# EAGLE board Display Board (EAGLE 8.2.2)
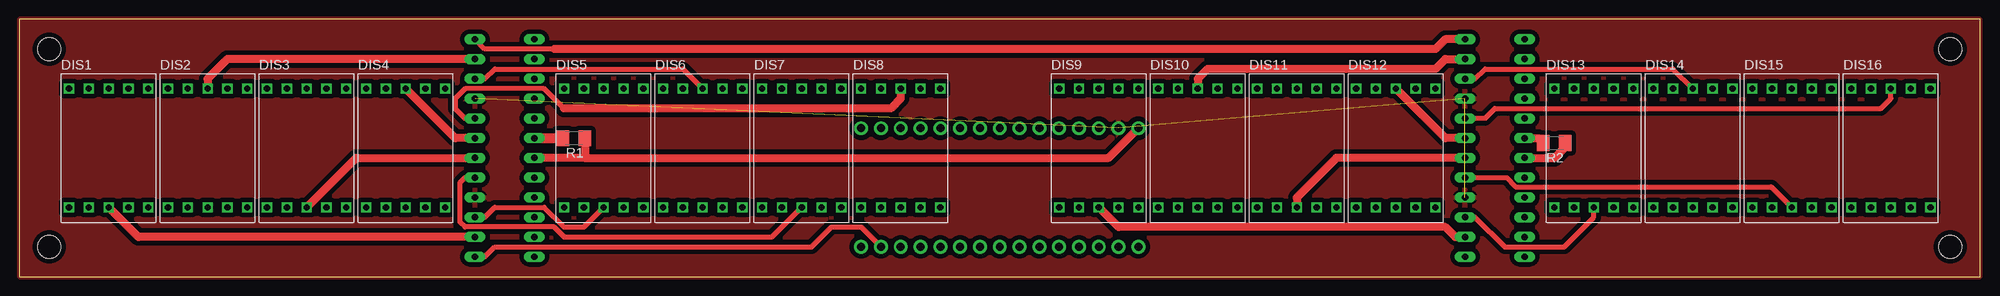
[diagram p0: board, top side]
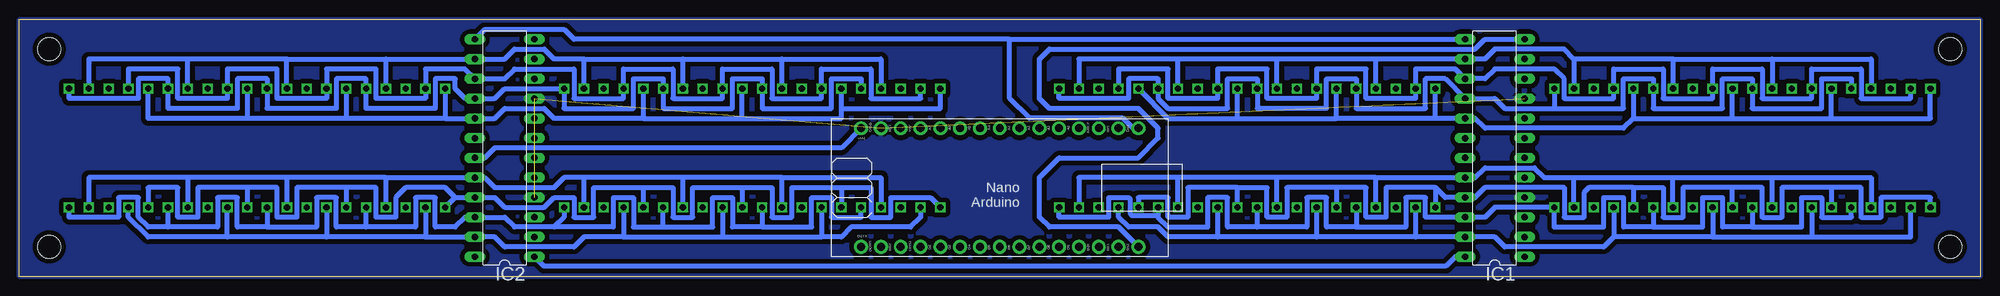
[diagram p1: board, bottom side, seen from below]

Size 251.46 x 33.02 mm. Coordinates in mm from the lower left corner, seen from the top.
Outline: 0,0 251.46,0 251.46,33.02 0,33.02 0,0
Copper layers (1*16): Top 0.035mm / dielectric 1.5mm / Bottom 0.035mm
Design rules "default *": minimum track width 10mil, minimum drill 24mil, track to track 8mil, track to pad 4mil, pad to pad 4mil, via to via 4mil, smd to smd 4mil, copper to edge 0mil, drill to drill 8mil, minimum pad ring 10mil, minimum via ring 8mil, stop-mask expansion 4mil, vias tented up to drill 0mil, thermal gap 10mil
Holes 3 mm at 247.65,29.21 247.65,3.81 3.81,29.21 3.81,3.81

## Footprints (pad centres in the part's own frame; a part is rotated, then mirrored left to right if it is on the bottom)
MAN6780 = drill 0.8 square: P$1 0,-15.24; P$2 2.54,-15.24; P$3 5.08,-15.24; P$4 7.62,-15.24; P$5 10.16,-15.24; P$6 10.16,0; P$7 7.62,0; P$8 5.08,0; P$9 2.54,0; P$10 0,0
DIL24-3 = drill 0.813 long: 1 -13.97,-3.81; 2 -11.43,-3.81; 3 -8.89,-3.81; 4 -6.35,-3.81; 5 -3.81,-3.81; 6 -1.27,-3.81; 7 1.27,-3.81; 8 3.81,-3.81; 9 6.35,-3.81; 10 8.89,-3.81; 11 11.43,-3.81; 12 13.97,-3.81; 13 13.97,3.81; 14 11.43,3.81; 15 8.89,3.81; 16 6.35,3.81; 17 3.81,3.81; 18 1.27,3.81; 19 -1.27,3.81; 20 -3.81,3.81; 21 -6.35,3.81; 22 -8.89,3.81; 23 -11.43,3.81; 24 -13.97,3.81
ARDUINO_NANO = drill 1.016 pad 1.778: 3V3 6.35,1.27; 5V 31.75,1.27; A0 11.43,1.27; A1 13.97,1.27; A2 16.51,1.27; A3 19.05,1.27; A4 21.59,1.27; A5 24.13,1.27; A6 26.67,1.27; A7 29.21,1.27; D2 29.21,16.51; D3 26.67,16.51; D4 24.13,16.51; D5 21.59,16.51; D6 19.05,16.51; D7 16.51,16.51; D8 13.97,16.51; D9 11.43,16.51; D10 8.89,16.51; D11 6.35,16.51; D12 3.81,16.51; D13 3.81,1.27; GND 31.75,16.51; GND. 36.83,1.27; REF 8.89,1.27; RST 34.29,16.51; RST. 34.29,1.27; RX1 36.83,16.51; TX1 39.37,16.51; VIN 39.37,1.27
M1206 = smd 1.6 x 2: 1 -1.4,0; 2 1.4,0

## Placement (x,y rotation side)
DIS1  MAN6780E  [MAN6780]  6.35,24.13 0 top
DIS2  MAN6780E  [MAN6780]  19.05,24.13 0 top
DIS3  MAN6780E  [MAN6780]  31.75,24.13 0 top
DIS4  MAN6780E  [MAN6780]  44.45,24.13 0 top
DIS5  MAN6780E  [MAN6780]  69.85,24.13 0 top
DIS6  MAN6780E  [MAN6780]  82.55,24.13 0 top
DIS7  MAN6780E  [MAN6780]  95.25,24.13 0 top
DIS8  MAN6780E  [MAN6780]  107.95,24.13 0 top
DIS9  MAN6780E  [MAN6780]  133.35,24.13 0 top
DIS10  MAN6780E  [MAN6780]  146.05,24.13 0 top
DIS11  MAN6780E  [MAN6780]  158.75,24.13 0 top
DIS12  MAN6780E  [MAN6780]  171.45,24.13 0 top
DIS13  MAN6780E  [MAN6780]  196.85,24.13 0 top
DIS14  MAN6780E  [MAN6780]  209.55,24.13 0 top
DIS15  MAN6780E  [MAN6780]  222.25,24.13 0 top
DIS16  MAN6780E  [MAN6780]  234.95,24.13 0 top
IC1  MAX7219CNG  [DIL24-3]  62.23,16.51 90 bottom
IC2  MAX7219CNG  [DIL24-3]  189.23,16.51 90 bottom
PCB1  ARDUINO_NANO  [ARDUINO_NANO]  104.14,20.32 180 bottom
R1  200R  [M1206]  71.12,17.78 180 top
R2  200R  [M1206]  196.85,17.14 180 top

## Library data of the parts
DIS1-DIS16 = 7segment
IC1 IC2 = maxim; MF: MAXIM; MPN: MAX7219CNG; OC_FARNELL: 1523914; OC_NEWARK: 34C4018
PCB1 = E14_Arduino_revC
R1 R2 = resistor

## Nets
GND: IC1.4 IC1.9 IC2.4 IC2.9 PCB1.GND.
N$1: DIS1.P$7 DIS2.P$7 DIS3.P$7 DIS4.P$7 DIS5.P$7 DIS6.P$7 DIS7.P$7 DIS8.P$7 IC1.14
N$2: DIS1.P$6 DIS2.P$6 DIS3.P$6 DIS4.P$6 DIS5.P$6 DIS6.P$6 DIS7.P$6 DIS8.P$6 IC1.16
N$3: DIS1.P$4 DIS2.P$4 DIS3.P$4 DIS4.P$4 DIS5.P$4 DIS6.P$4 DIS7.P$4 DIS8.P$4 IC1.20
N$4: DIS1.P$2 DIS2.P$2 DIS3.P$2 DIS4.P$2 DIS5.P$2 DIS6.P$2 DIS7.P$2 DIS8.P$2 IC1.23
N$5: DIS1.P$1 DIS2.P$1 DIS3.P$1 DIS4.P$1 DIS5.P$1 DIS6.P$1 DIS7.P$1 DIS8.P$1 IC1.21
N$6: DIS1.P$9 DIS2.P$9 DIS3.P$9 DIS4.P$9 DIS5.P$9 DIS6.P$9 DIS7.P$9 DIS8.P$9 IC1.15
N$7: DIS1.P$10 DIS2.P$10 DIS3.P$10 DIS4.P$10 DIS5.P$10 DIS6.P$10 DIS7.P$10 DIS8.P$10 IC1.17
N$8: DIS1.P$5 DIS2.P$5 DIS3.P$5 DIS4.P$5 DIS5.P$5 DIS6.P$5 DIS7.P$5 DIS8.P$5 IC1.22
N$9: DIS1.P$3 DIS1.P$8 IC1.2
N$10: DIS2.P$3 DIS2.P$8 IC1.11
N$11: DIS3.P$3 DIS3.P$8 IC1.6
N$12: DIS4.P$3 DIS4.P$8 IC1.7
N$13: DIS5.P$3 DIS5.P$8 IC1.3
N$14: DIS6.P$3 DIS6.P$8 IC1.10
N$15: DIS9.P$7 DIS10.P$7 DIS11.P$7 DIS12.P$7 DIS13.P$7 DIS14.P$7 DIS15.P$7 DIS16.P$7 IC2.14
N$16: DIS8.P$3 DIS8.P$8 IC1.8
N$17: DIS9.P$6 DIS10.P$6 DIS11.P$6 DIS12.P$6 DIS13.P$6 DIS14.P$6 DIS15.P$6 DIS16.P$6 IC2.16
N$18: DIS7.P$3 DIS7.P$8 IC1.5
N$19: DIS9.P$4 DIS10.P$4 DIS11.P$4 DIS12.P$4 DIS13.P$4 DIS14.P$4 DIS15.P$4 DIS16.P$4 IC2.20
N$20: DIS9.P$2 DIS10.P$2 DIS11.P$2 DIS12.P$2 DIS13.P$2 DIS14.P$2 DIS15.P$2 DIS16.P$2 IC2.23
N$21: DIS9.P$1 DIS10.P$1 DIS11.P$1 DIS12.P$1 DIS13.P$1 DIS14.P$1 DIS15.P$1 DIS16.P$1 IC2.21
N$22: DIS9.P$9 DIS10.P$9 DIS11.P$9 DIS12.P$9 DIS13.P$9 DIS14.P$9 DIS15.P$9 DIS16.P$9 IC2.15
N$23: IC1.18 R1.2
N$24: DIS9.P$10 DIS10.P$10 DIS11.P$10 DIS12.P$10 DIS13.P$10 DIS14.P$10 DIS15.P$10 DIS16.P$10 IC2.17
N$25: DIS9.P$5 DIS10.P$5 DIS11.P$5 DIS12.P$5 DIS13.P$5 DIS14.P$5 DIS15.P$5 DIS16.P$5 IC2.22
N$26: DIS9.P$3 DIS9.P$8 IC2.2
N$27: DIS10.P$3 DIS10.P$8 IC2.11
N$28: DIS11.P$3 DIS11.P$8 IC2.6
N$29: DIS12.P$3 DIS12.P$8 IC2.7
N$30: DIS13.P$3 DIS13.P$8 IC2.3
N$31: DIS14.P$3 DIS14.P$8 IC2.10
N$32: DIS16.P$3 DIS16.P$8 IC2.8
N$33: DIS15.P$3 DIS15.P$8 IC2.5
N$34: IC2.18 R2.2
N$35: IC1.24 IC2.1
N$36: IC1.13 IC2.13 PCB1.D13
N$37: IC1.12 IC2.12 PCB1.D12
N$38: IC1.1 PCB1.D11
VCC: IC1.19 IC2.19 PCB1.VIN R1.1 R2.1

## Tracks (layer width: path | path; a pad name or v marks a point on that pad's centre or on a via)
GND  (3 unrouted)
  pour Top (isolate 0.61): 0,33.02 0,0 251.46,0 251.46,33.02
  pour Bottom (isolate 0.61): 0,33.02 0,0 251.46,0 251.46,33.02
N$1
  Bottom 0.61: 77.47,27.94 90.17,27.94 | 90.17,27.94 102.87,27.94 | 102.87,27.94 115.57,27.94 DIS8.P$7 | DIS7.P$7 102.87,27.94 | DIS5.P$7 77.47,27.94 | DIS6.P$7 90.17,27.94 | 39.37,27.94 52.07,27.94 | 39.37,27.94 26.67,27.94 | 26.67,27.94 13.97,27.94 DIS1.P$7 | 26.67,27.94 DIS2.P$7 | 39.37,27.94 DIS3.P$7 | 52.07,27.94 DIS4.P$7 | 77.47,27.94 IC1.14 63.5,27.94 62.23,29.21 53.34,29.21 52.07,27.94
N$2
  Bottom 0.61: DIS8.P$6 118.11,22.86 109.22,22.86 109.22,25.4 105.41,25.4 DIS7.P$6 105.41,22.86 104.14,21.59 96.52,21.59 96.52,25.4 92.71,25.4 DIS6.P$6 92.71,21.59 83.82,21.59 83.82,25.4 80.01,25.4 DIS5.P$6 80.01,21.59 71.12,21.59 71.12,25.4 68.58,25.4 IC1.16 62.23,22.86 60.96,21.59 54.61,21.59 | DIS4.P$6 54.61,21.59 | 54.61,21.59 45.72,21.59 45.72,25.4 41.91,25.4 DIS3.P$6 41.91,21.59 33.02,21.59 33.02,25.4 29.21,25.4 DIS2.P$6 29.21,21.59 20.32,21.59 20.32,25.4 16.51,25.4 DIS1.P$6
N$3
  Bottom 0.61: 90.17,12.7 102.87,12.7 | 77.47,12.7 90.17,12.7 | 102.87,12.7 115.57,12.7 DIS8.P$4 | DIS7.P$4 102.87,12.7 | DIS6.P$4 90.17,12.7 | DIS5.P$4 77.47,12.7 | 39.37,12.7 26.67,12.7 | 52.07,12.7 39.37,12.7 | 26.67,12.7 13.97,12.7 DIS1.P$4 | DIS2.P$4 26.67,12.7 | DIS3.P$4 39.37,12.7 | DIS4.P$4 52.07,12.7 | 77.47,12.7 IC1.20 64.77,12.7 63.5,13.97 57.15,13.97 55.88,12.7 52.07,12.7
N$4
  Bottom 0.61: DIS1.P$2 8.89,5.08 21.59,5.08 | 34.29,5.08 21.59,5.08 | 34.29,5.08 46.99,5.08 | 72.39,5.08 85.09,5.08 | 85.09,5.08 97.79,5.08 | DIS5.P$2 72.39,5.08 | DIS6.P$2 85.09,5.08 | DIS7.P$2 97.79,5.08 | DIS2.P$2 21.59,5.08 | DIS3.P$2 34.29,5.08 | DIS4.P$2 46.99,5.08 | 72.39,5.08 IC1.23 62.23,5.08 60.96,3.81 48.26,3.81 46.99,5.08 | 97.79,5.08 104.14,5.08 105.41,6.35 109.22,6.35 110.49,7.62 DIS8.P$2
N$5
  Bottom 0.61: 69.85,9.53 DIS5.P$1 69.85,11.43 | 69.85,11.43 76.2,11.43 76.2,7.62 78.74,7.62 78.74,11.43 82.55,11.43 | 82.55,11.43 DIS6.P$1 | 82.55,11.43 88.9,11.43 88.9,7.62 91.44,7.62 91.44,11.43 95.25,11.43 | 95.25,11.43 101.6,11.43 101.6,7.62 104.14,7.62 104.14,10.16 107.95,10.16 DIS8.P$1 | DIS7.P$1 95.25,11.43 | 44.45,11.43 50.16,11.43 50.8,10.79 50.8,7.62 53.34,7.62 53.34,11.43 63.5,11.43 64.77,10.16 IC1.21 68.58,10.16 69.85,11.43 | 44.45,11.43 DIS4.P$1 | 19.05,11.43 25.4,11.43 25.4,7.62 27.94,7.62 27.94,11.43 31.75,11.43 | 19.05,11.43 DIS2.P$1 | 31.75,11.43 38.1,11.43 38.1,7.62 40.64,7.62 40.64,11.43 44.45,11.43 | DIS3.P$1 31.75,11.43 | 19.05,11.43 15.24,11.43 15.24,7.62 12.7,7.62 12.7,10.16 6.35,10.16 DIS1.P$1
N$6
  Bottom 0.61: DIS8.P$9 110.49,26.67 104.14,26.67 104.14,22.86 97.79,22.86 DIS7.P$9 97.79,26.67 91.44,26.67 91.44,22.86 85.09,22.86 DIS6.P$9 85.09,26.67 78.74,26.67 78.74,22.86 72.39,22.86 DIS5.P$9 72.39,26.67 67.31,26.67 IC1.15 63.5,25.4 62.23,26.67 54.61,26.67 53.34,25.4 53.34,22.86 46.99,22.86 DIS4.P$9 46.99,26.67 40.64,26.67 40.64,22.86 34.29,22.86 DIS3.P$9 34.29,26.67 27.94,26.67 27.94,22.86 21.59,22.86 DIS2.P$9 21.59,26.67 15.24,26.67 15.24,22.86 8.89,22.86 DIS1.P$9
N$7
  Bottom 0.61: 69.85,20.32 82.55,20.32 | 95.25,20.32 82.55,20.32 | 95.25,20.32 DIS7.P$10 | 82.55,20.32 DIS6.P$10 | 69.85,20.32 DIS5.P$10 | DIS4.P$10 44.45,20.32 | 44.45,20.32 31.75,20.32 | 31.75,20.32 DIS3.P$10 | 31.75,20.32 19.05,20.32 | 19.05,20.32 DIS2.P$10 | 19.05,20.32 6.35,20.32 DIS1.P$10 | 69.85,20.32 IC1.17 64.77,20.32 63.5,19.05 45.72,19.05 44.45,20.32 | DIS8.P$10 104.14,20.32 95.25,20.32
N$8
  Bottom 0.61: 80.01,6.35 73.66,6.35 73.66,10.16 71.12,10.16 71.12,7.62 IC1.22 63.5,7.62 62.23,8.89 DIS4.P$5 54.61,6.35 48.26,6.35 48.26,10.16 45.72,10.16 45.72,6.35 41.91,6.35 | 80.01,6.35 83.82,6.35 83.82,10.16 86.36,10.16 86.36,6.35 92.71,6.35 | DIS5.P$5 80.01,6.35 | 92.71,6.35 96.52,6.35 96.52,10.16 99.06,10.16 99.06,6.35 104.14,6.35 105.41,7.62 | DIS8.P$5 118.11,7.62 111.76,7.62 111.76,10.16 109.22,10.16 109.01,9.95 109.01,8.07 108.77,7.83 105.62,7.83 105.41,7.62 | DIS7.P$5 105.41,7.62 | 92.71,6.35 DIS6.P$5 | 41.91,6.35 35.56,6.35 35.56,10.16 33.02,10.16 33.02,6.35 29.21,6.35 | 29.21,6.35 22.86,6.35 22.86,10.16 20.32,10.16 20.32,7.62 16.51,7.62 DIS1.P$5 | DIS3.P$5 41.91,6.35 | DIS2.P$5 29.21,6.35
N$9
  Top 1.016: IC1.2 15.24,5.08 DIS1.P$3
N$10
  Top 1.016: IC1.11 26.67,27.94 24.13,25.4 DIS2.P$8
N$11
  Top 1.016: DIS3.P$3 43.18,15.24 IC1.6
N$12
  Top 1.016: IC1.7 55.88,17.78 DIS4.P$8
N$13
  Top 0.61: IC1.3 59.69,7.62 60.96,8.89 67.31,8.89 69.85,6.35 72.39,6.35 DIS5.P$3
N$14
  Top 0.61: IC1.10 59.69,25.4 60.96,26.67 85.09,26.67 DIS6.P$8
N$15
  Bottom 0.61: 217.17,27.94 229.87,27.94 | 217.17,27.94 204.47,27.94 | 204.47,27.94 IC2.14 189.23,27.94 187.96,29.21 184.15,29.21 182.88,27.94 179.07,27.94 | 229.87,27.94 242.57,27.94 DIS16.P$7 | DIS15.P$7 229.87,27.94 | DIS14.P$7 217.17,27.94 | 204.47,27.94 DIS13.P$7 | 166.37,27.94 153.67,27.94 | 179.07,27.94 166.37,27.94 | 153.67,27.94 140.97,27.94 DIS9.P$7 | DIS10.P$7 153.67,27.94 | DIS11.P$7 166.37,27.94 | DIS12.P$7 179.07,27.94
N$16
  Top 0.61: 69.85,21.59 67.31,24.13 57.15,24.13 55.88,22.86 55.88,21.59 57.15,20.32 IC1.8
  Top 1.016: DIS8.P$8 113.03,22.86 111.76,21.59 69.85,21.59
N$17
  Bottom 0.61: DIS16.P$6 245.11,22.86 236.22,22.86 236.22,25.4 232.41,25.4 DIS15.P$6 232.41,21.59 223.52,21.59 223.52,25.4 219.71,25.4 DIS14.P$6 219.71,21.59 210.82,21.59 210.82,25.4 207.01,25.4 DIS13.P$6 207.01,21.59 198.12,21.59 198.12,25.4 195.58,25.4 195.58,24.13 194.31,22.86 IC2.16 190.5,22.86 189.23,24.13 DIS12.P$6 181.61,21.59 172.72,21.59 172.72,25.4 168.91,25.4 DIS11.P$6 168.91,21.59 160.02,21.59 160.02,25.4 156.21,25.4 DIS10.P$6 156.21,21.59 147.32,21.59 147.32,25.4 143.51,25.4 DIS9.P$6
N$18
  Top 0.61: IC1.5 57.15,12.7 56.52,12.06 56.52,6.99 57.15,6.35 68.58,6.35 69.85,5.08 96.52,5.08 DIS7.P$3
N$19
  Bottom 0.61: 204.47,12.7 IC2.20 191.77,12.7 190.5,11.43 182.88,11.43 181.61,12.7 179.07,12.7 | 204.47,12.7 DIS13.P$4 | 204.47,12.7 217.17,12.7 | 217.17,12.7 DIS14.P$4 | 217.17,12.7 229.87,12.7 | 229.87,12.7 DIS15.P$4 | 229.87,12.7 242.57,12.7 DIS16.P$4 | 166.37,12.7 179.07,12.7 | 153.67,12.7 166.37,12.7 | 153.67,12.7 140.97,12.7 DIS9.P$4 | DIS12.P$4 179.07,12.7 | DIS11.P$4 166.37,12.7 | DIS10.P$4 153.67,12.7
N$20
  Bottom 0.61: 199.39,5.08 212.09,5.08 | 199.39,5.08 IC2.23 190.5,5.08 189.23,3.81 180.34,3.81 179.07,5.08 173.99,5.08 | 212.09,5.08 224.79,5.08 | DIS16.P$2 237.49,7.62 234.95,5.08 224.79,5.08 | 224.79,5.08 DIS15.P$2 | DIS14.P$2 212.09,5.08 | DIS13.P$2 199.39,5.08 | 161.29,5.08 148.59,5.08 | 173.99,5.08 161.29,5.08 | 148.59,5.08 146.05,5.08 144.78,6.35 137.16,6.35 135.89,7.62 DIS9.P$2 | DIS10.P$2 148.59,5.08 | DIS11.P$2 161.29,5.08 | DIS12.P$2 173.99,5.08
N$21
  Bottom 0.61: 195.58,10.16 IC2.21 190.5,10.16 189.23,8.89 184.15,8.89 182.88,10.16 180.34,10.16 180.34,7.62 177.8,7.62 177.8,11.43 171.45,11.43 | 195.58,10.16 DIS13.P$1 | 195.58,10.16 196.85,11.43 201.93,11.43 203.2,10.16 203.2,7.62 205.74,7.62 205.74,11.43 209.55,11.43 | 209.55,11.43 DIS14.P$1 | 209.55,11.43 215.9,11.43 215.9,7.62 218.44,7.62 218.44,11.43 222.25,11.43 | 222.25,11.43 DIS15.P$1 | 222.25,11.43 228.6,11.43 228.6,7.62 231.14,7.62 231.14,11.43 234.95,11.43 DIS16.P$1 | 171.45,11.43 DIS12.P$1 | 171.45,11.43 167.64,11.43 167.64,7.62 165.1,7.62 165.1,11.43 158.75,11.43 | 158.75,11.43 DIS11.P$1 | 158.75,11.43 154.94,11.43 154.94,7.62 152.4,7.62 152.4,11.43 146.05,11.43 | 146.05,11.43 DIS10.P$1 | 146.05,11.43 142.24,11.43 142.24,7.62 139.7,7.62 139.7,10.16 134.62,10.16 DIS9.P$1
N$22
  Bottom 0.61: DIS16.P$9 237.49,26.67 231.14,26.67 231.14,22.86 224.79,22.86 DIS15.P$9 224.79,26.67 218.44,26.67 218.44,22.86 212.09,22.86 DIS14.P$9 212.09,26.67 205.74,26.67 205.74,22.86 199.39,22.86 DIS13.P$9 199.39,26.67 194.31,26.67 IC2.15 189.23,25.4 187.96,26.67 180.34,26.67 180.34,22.86 173.99,22.86 DIS12.P$9 173.99,26.67 167.64,26.67 167.64,22.86 161.29,22.86 DIS11.P$9 161.29,26.67 154.94,26.67 154.94,22.86 148.59,22.86 DIS10.P$9 148.59,26.67 142.24,26.67 142.24,22.86 135.89,22.86 DIS9.P$9
N$23
  Top 1.27: IC1.18 R1.2
N$24
  Bottom 0.61: 209.55,20.32 222.25,20.32 | 196.85,20.32 209.55,20.32 | 196.85,20.32 IC2.17 190.5,20.32 189.23,21.59 184.15,21.59 182.88,20.32 171.45,20.32 | 222.25,20.32 234.95,20.32 DIS16.P$10 | DIS15.P$10 222.25,20.32 | DIS14.P$10 209.55,20.32 | DIS13.P$10 196.85,20.32 | 146.05,21.59 146.05,20.32 158.75,20.32 | 146.05,21.59 DIS10.P$10 | 146.05,21.59 133.35,21.59 DIS9.P$10 | 171.45,20.32 158.75,20.32 | 158.75,20.32 DIS11.P$10 | DIS12.P$10 171.45,20.32
N$25
  Bottom 0.61: 207.01,6.35 200.66,6.35 200.66,10.16 198.12,10.16 198.12,6.35 195.58,6.35 194.31,7.62 IC2.22 189.23,7.62 187.96,6.35 182.88,6.35 | 207.01,6.35 DIS13.P$5 | 207.01,6.35 210.82,6.35 210.82,10.16 213.36,10.16 213.36,6.35 219.71,6.35 | 219.71,6.35 223.52,6.35 223.52,10.16 226.06,10.16 226.06,6.35 232.41,6.35 | DIS14.P$5 219.71,6.35 | 232.41,6.35 DIS15.P$5 | 232.41,6.35 234.95,6.35 236.22,7.62 236.22,10.16 238.76,10.16 238.76,7.62 245.11,7.62 DIS16.P$5 | 182.88,6.35 175.26,6.35 175.26,10.16 172.72,10.16 172.72,6.35 168.91,6.35 | 168.91,6.35 DIS11.P$5 | 168.91,6.35 162.56,6.35 162.56,10.16 160.02,10.16 160.02,6.35 156.21,6.35 | 156.21,6.35 149.86,6.35 149.86,10.16 147.32,10.16 147.32,7.62 143.51,7.62 DIS9.P$5 | DIS10.P$5 156.21,6.35 | DIS12.P$5 181.61,7.62 182.88,6.35
N$26
  Top 1.016: IC2.2 184.15,5.08 182.88,6.35 140.97,6.35 DIS9.P$3
N$27
  Top 1.016: IC2.11 182.88,27.94 181.61,26.67 152.4,26.67 151.13,25.4 DIS10.P$8
N$28
  Top 1.016: IC2.6 168.91,15.24 163.83,10.16 DIS11.P$3
N$29
  Top 1.016: IC2.7 182.88,17.78 DIS12.P$8
N$30
  Top 0.61: IC2.3 186.69,7.62 190.5,3.81 198.12,3.81 201.93,7.62 DIS13.P$3
N$31
  Top 0.61: IC2.10 186.69,25.4 187.96,26.67 212.09,26.67 DIS14.P$8
N$32
  Top 0.61: IC2.8 187.96,20.32 189.23,21.59 238.76,21.59 240.03,22.86 DIS16.P$8
N$33
  Top 0.61: IC2.5 190.73,12.7 191.9,11.53 224.69,11.53 DIS15.P$3
N$34
  Top 1.016: IC2.18 194.81,17.78 R2.2
N$35
  Bottom 0.61: IC1.24 67.31,2.54 68.53,1.32 184.2,1.32 IC2.1
N$36
  Bottom 0.61: PCB1.D13 108.66,19.05 109.95,20.34 121.94,20.34 124.46,22.86 124.46,30.48 | 124.46,30.48 180.34,30.48 181.56,31.7 191.82,31.7 IC2.13 | 124.46,30.48 IC1.13
N$37
  Top 0.61: IC1.12 59.69,29.21 68.58,29.21
  Top 1.016: 68.58,29.21 181.61,29.21 182.88,30.48 IC2.12
  Bottom 0.61: PCB1.D12 110.49,6.35 119.38,6.35 120.65,7.62 120.65,12.7 118.11,15.24 107.95,15.24 105.41,17.78 105.41,19.05 107.95,21.59 119.38,21.59 120.65,22.86 120.65,27.94 119.38,29.21 64.77,29.21 63.5,30.48 IC1.12
N$38
  Top 0.61: IC1.1 59.69,2.54 60.96,3.81 101.6,3.81 104.14,6.35 107.95,6.35 PCB1.D11
VCC
  Top 1.016: IC2.19 196.85,15.24 198.12,16.51 198.12,17.02 R2.1 | 72.39,17.65 R1.1 72.52,15.37 72.39,15.24 | PCB1.VIN 139.7,15.24 72.39,15.24 | 72.39,15.24 IC1.19
  Bottom 0.61: IC2.19 191.77,15.24 190.5,16.51 146.05,16.51 PCB1.VIN